# Altium PCB PCB1.PcbDoc
Units mm, origin at the board's own origin, x right, y up, seen from the top; angles counter-clockwise.
Board outline 158.53 x 100 mm, 2 copper layers (Top Layer, Bottom Layer); 23 components, 39 nets, 139 pads, 0 vias.
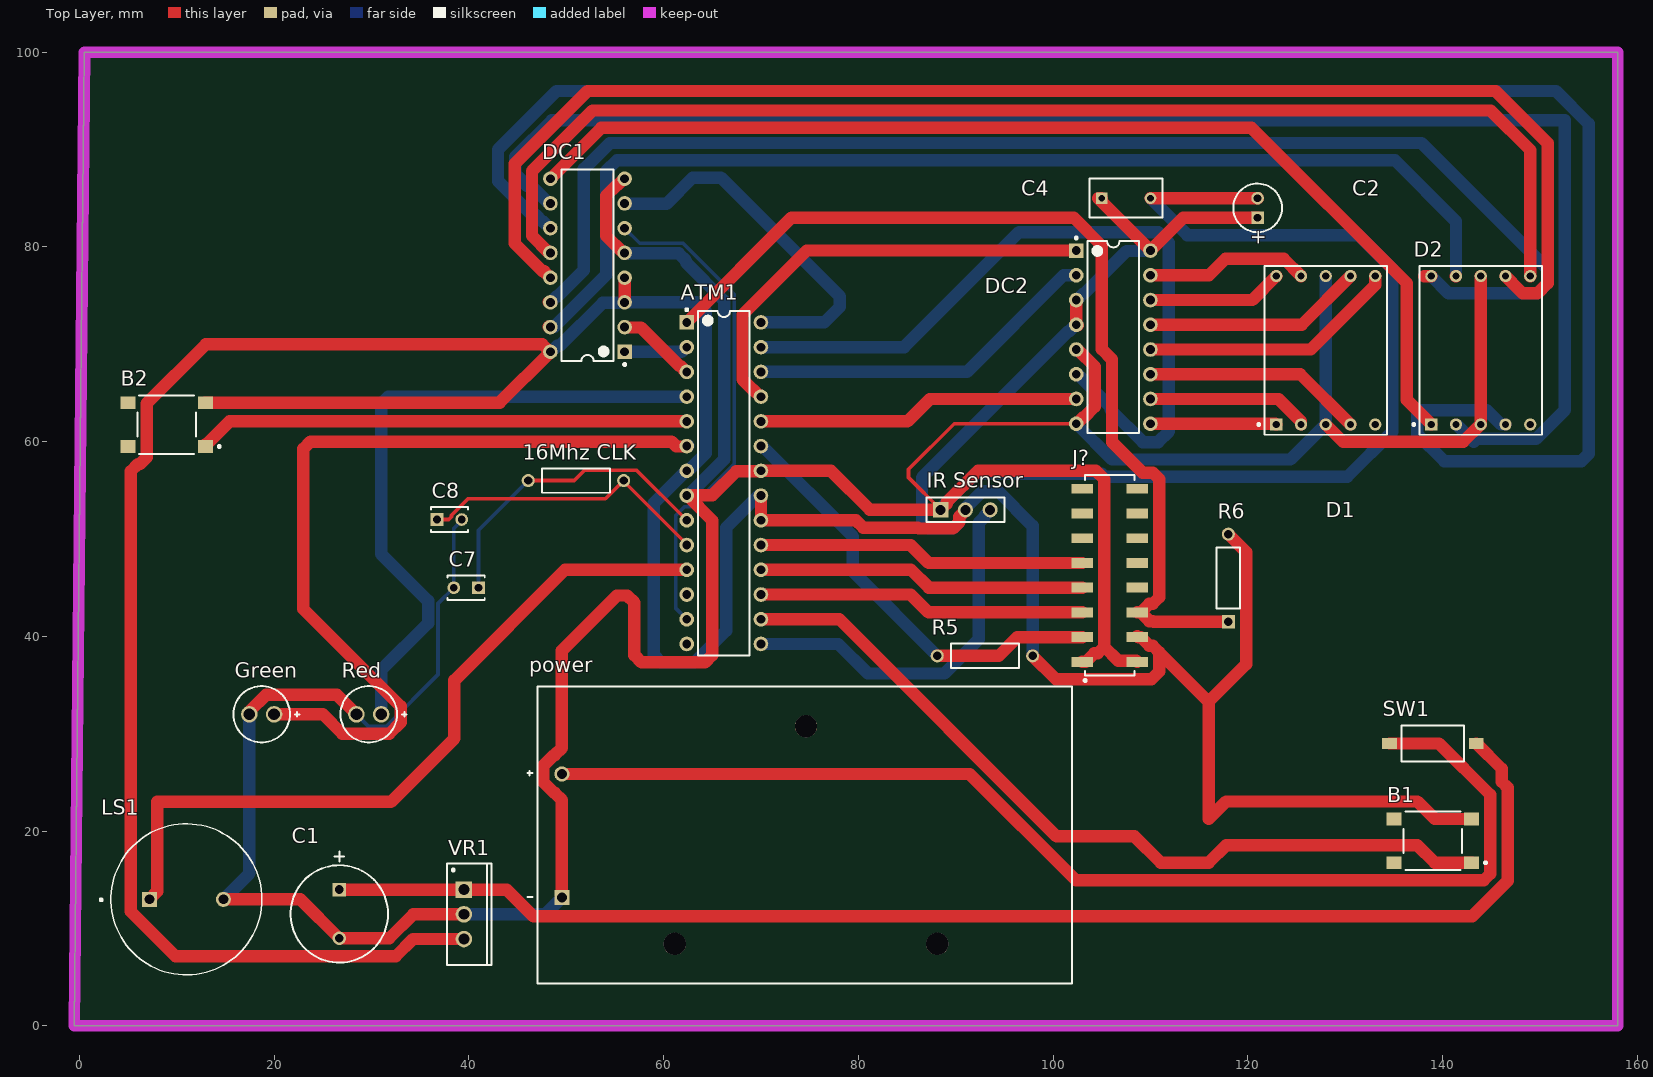
[diagram p0: Top Layer view]
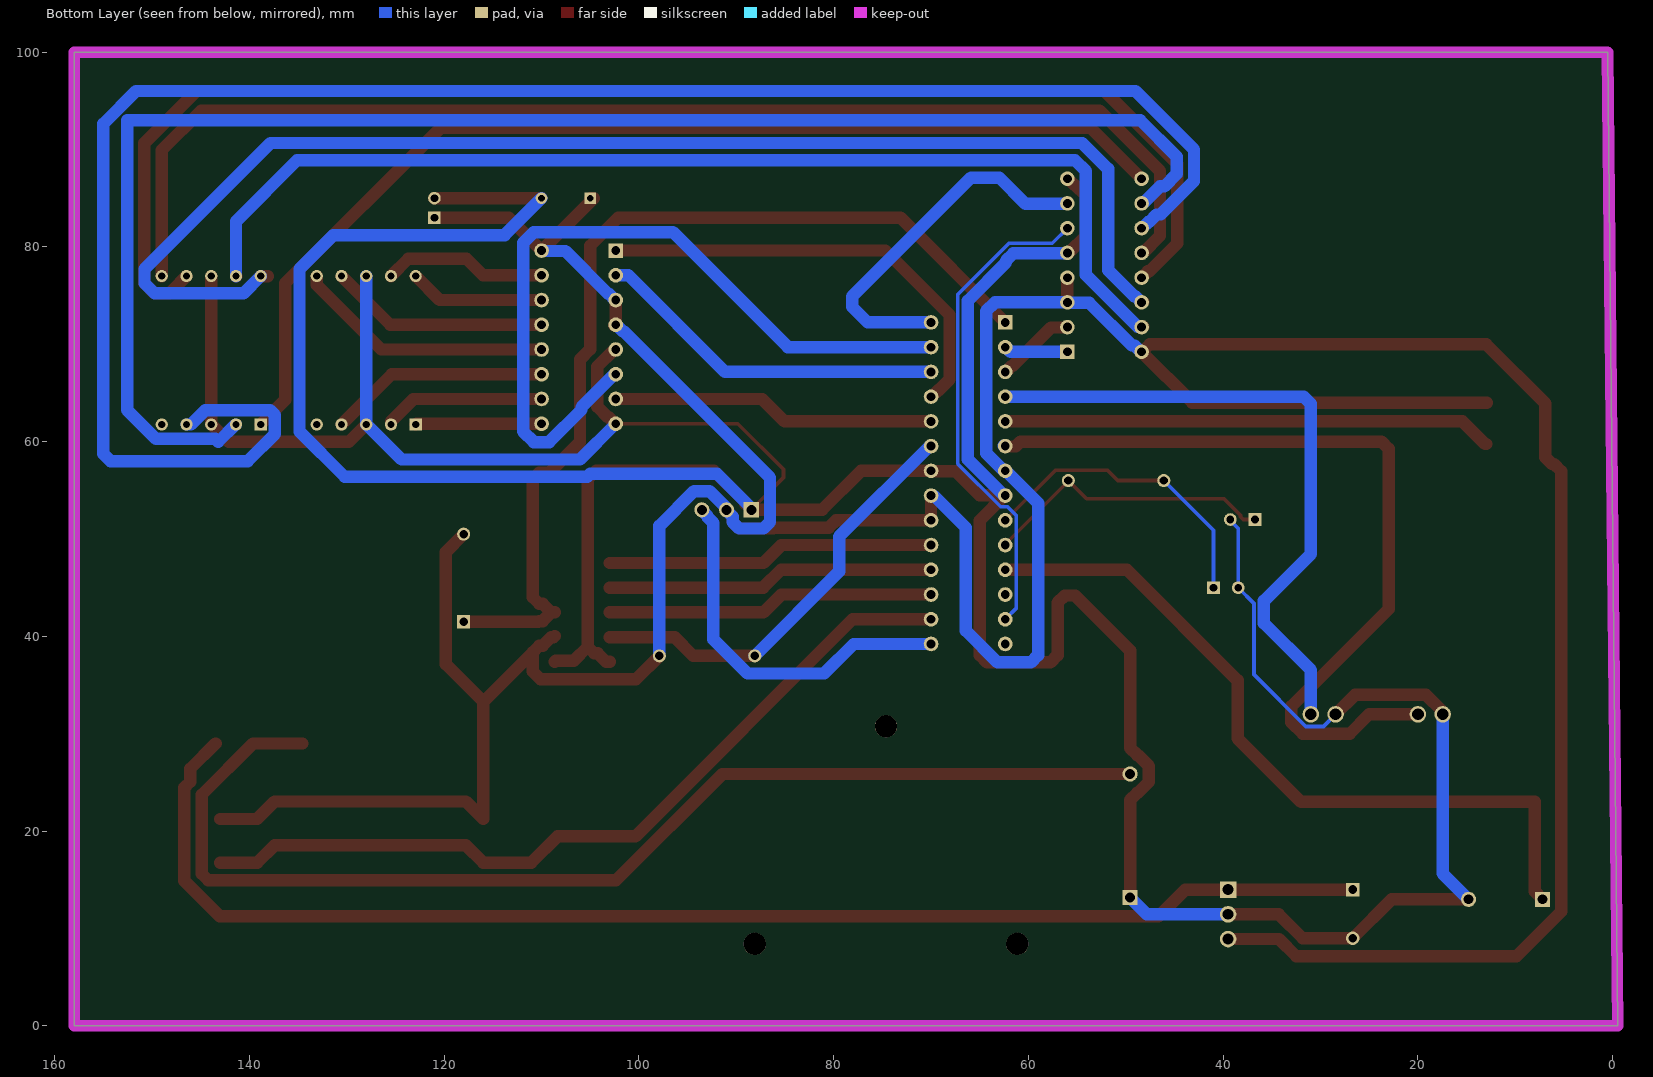
[diagram p1: Bottom Layer view, seen from below]

## Layer stack, top to bottom
Top Solder: solder mask 0.0102, Solder Resist, Dk 3.5
Top Layer: signal copper 0.0356
Dielectric 1: dielectric 0.32, FR-4, Dk 4.8
Bottom Layer: signal copper 0.0356
Bottom Solder: solder mask 0.0102, Solder Resist, Dk 3.5

## Board outline
-0.533,0 158,0 158,100 0.533,100

## Design rules (kind name [scope] priority, off if disabled: settings)
BoardOutlineClearance [All] p1: gap=0.2 ignorepadtopadclearanceinfootprint=FALSE except(0.4: Arc-SplitBarrior Arc-SplitContinuation Track-SplitBarrior Track-SplitContinuation SMDPad-SplitBarrior SMDPad-SplitContinuation THPad-SplitBarrior THPad-SplitContinuation Via-SplitBarrior Via-SplitContinuation Fill-SplitBarrior Fill-SplitContinuation Poly-SplitBarrior Poly-SplitContinuation Region-SplitBarrior Region-SplitContinuation Text-SplitBarrior Text-SplitContinuation)
Clearance "Clearance Bottom Layer" [OnLayer('Bottom Layer')] p1: gap=0.203 ignorepadtopadclearanceinfootprint=TRUE except(0.254: Arc-Text Track-Text SMDPad-Text THPad-Text Via-Text Fill-Text Poly-Text Region-Text Text-Text)
Clearance "Clearance Top Layer" [OnLayer('Top Layer')] p2: gap=0.203 ignorepadtopadclearanceinfootprint=TRUE except(0.254: Arc-Text Track-Text SMDPad-Text THPad-Text Via-Text Fill-Text Poly-Text Region-Text Text-Text)
Clearance [All] p3: gap=0.2 ignorepadtopadclearanceinfootprint=FALSE except(0.089: Arc-Arc Arc-Track Arc-SMDPad Track-Track Track-SMDPad SMDPad-SMDPad; 0.127: Arc-Via Track-Via SMDPad-Via THPad-Via Via-Via; 0.254: Arc-Text Track-Text SMDPad-Text THPad-Text Via-Text Fill-Text Poly-Text Region-Text Text-Text)
HoleSize [All] p1: absolutevalues=TRUE maxlimit=6.3 minlimit=0.2 maxpercent=80.000 minpercent=20.000
MinimumAnnularRing [All] p1: minimumring=0.076
MinimumSolderMaskSliver [All] p1: minsoldermaskwidth=0.1
PolygonConnect PolygonConnect_1 [All] p1: thpad.connectstyle=Relief thpad.reliefconductorwidth=0.508 thpad.reliefentries=4 thpad.polygonreliefangle="90 Angle" thpad.airgapwidth=0.254 smdpad.connectstyle=Relief smdpad.reliefconductorwidth=0.508 smdpad.reliefentries=4 smdpad.polygonreliefangle="90 Angle" smdpad.airgapwidth=0.254 via.connectstyle=Direct via.reliefconductorwidth=0.508 via.reliefentries=4 via.polygonreliefangle="90 Angle" via.airgapwidth=0.254
RoutingCorners [All] p1: cornerstyle=Round minsetback=2.54 maxsetback=2.54
RoutingVias [All] p1: holewidth=0.5 width=1 viastyle="Through Hole" minholewidth=0.2 minwidth=0.45 maxholewidth=1 maxwidth=2
SilkToSilkClearance [All] p1: silktosilkclearance=0.1
SilkToSolderMaskClearance [IsPad] p1: minsilkscreentomaskgap=0.1 clearancetoexposedcopper=TRUE
SolderMaskExpansion [All] p1: expansion=0.102 istentingtop=FALSE
Width [All] p1: maxlimit=2.54 minlimit=0.089 preferedwidth=0.381
25 further rules are at their usual default settings.

## Components (designator, comment, footprint, x,y, rotation, side; value= is the part's Value field where it differs from the comment)
"16Mhz CLK" "" OMTE-RES7X2.5-2 51,56 r180 top
ATM1 "ATmega328-PU" 28P3 66.19,55.73 r0 top
B1 "" FP-PTS645SM43SMTR92LFS-MFG 139,19 r180 top
B2 "" FP-PTS645SM43SMTR92LFS-MFG 8.975,61.75 r180 top
C1 "10uF" PNSC-EEU-EE2G100-2_V 26.7,11.5 r270 top
C2 "10 uF" CAPPR55-200-1100X500X1200 121,84 r90 top
C4 ".1 uF" FP-RDE5E1+0_5-4-MFG 107.5,85 r0 top
C7 "C315C220K1G5TA" KEMT-C315-THT-2 39.73,45 r180 top
C8 "C315C220K1G5TA" KEMT-C315-THT-2 38,52 r0 top
D1 "HDSP-H153" FP-HDSP-H153-MFG 128,69.38 r0 top
D2 "HDSP-H153" FP-HDSP-H153-MFG 143.92,69.38 r0 top
DC1 "" N0016A 52.19,78.11 r180 top
DC2 "" N0016A 106.19,70.73 r0 top
Green "" VISH-TSAL6200 18.73,32 r180 top
"IR Sensor" "TSW-103-07-F-S" SMTC-TSW-103-07-X-S 88.46,53 r0 top
J? "SSM-108-L-DV" SMTC-SSM-108-X-DV 105.825,46.27 r90 top
LS1 "" FP-CVS-1508-MFG 11,13 r0 top value=8Ω
power "" FP-BH9VPC-MFG 74.5,19.6 r180 top
R5 "10K" OMTE-RES7X2.5-2 93,38 r180 top
R6 "1k" RESA60-630X240 118,46 r90 top
Red "" VISH-TSAL6200 29.73,32 r180 top
SW1 "" FP-A6S-1104-H-MFG 139,29 r270 top
VR1 "" TO220 39.5,11.46 r270 top

## Footprints (in the part's own frame and the unit in brackets; to place one, negate y for a bottom-side part, rotate by r counter-clockwise, add the part's x,y. Pads: shape width x height; smd on the part's side, far side on the other; paste and mask are expansions set on the pad)
28P3 [mm] "28-Pin Plastic Dual In-Line Package (PDIP)"
  rect 1.5x1.5 hole 0.9: 1(-3.81,16.51)
  round 1.5 hole 0.9: 2(-3.81,13.97) 3(-3.81,11.43) 4(-3.81,8.89) 5(-3.81,6.35) 6(-3.81,3.81) 7(-3.81,1.27) 8(-3.81,-1.27) 9(-3.81,-3.81) 10(-3.81,-6.35) 11(-3.81,-8.89) 12(-3.81,-11.43) 13(-3.81,-13.97) 14(-3.81,-16.51) 15(3.81,-16.51) 16(3.81,-13.97) 17(3.81,-11.43) 18(3.81,-8.89) 19(3.81,-6.35) 20(3.81,-3.81) 21(3.81,-1.27) 22(3.81,1.27) 23(3.81,3.81) 24(3.81,6.35) 25(3.81,8.89) 26(3.81,11.43) 27(3.81,13.97) 28(3.81,16.51)
  silkscreen extent -3.93,-17.7 2.65,17.93, body extent -3.6,-17.65 3.6,17.65, height 4.58
CAPPR55-200-1100X500X1200 [mm] "THD, 2-Leads, Dia 5mm, Body Length 11mm"
  rect 1.3x1.3 hole 0.8: 1(-1,0)
  round 1.3 hole 0.8: 2(1,0)
  silkscreen extent -2.5,-2.5 2.5,2.5, body extent -2.5,-2.5 2.5,2.5, height 12
FP-A6S-1104-H-MFG [mm]
  rect 1.1x1.5 smd paste+0 mask+0: 1(0,-4.45) 2(0,4.45)
  silkscreen extent -1.84,-3.2 1.84,3.2, body extent -1.94,-5.3 1.94,5.3, height 0.25
FP-BH9VPC-MFG [mil]
  rect 61.65x61.65 hole 40 paste-39370.1 mask+0: 1(982,253)
  round 61.65 hole 40 paste-39370.1 mask+0: 2(982,-247)
  round 90.16 hole 90.16 unplated paste-39370.1 mask+0: ""(-536,440) ""(-5,-440) ""(526,440)
  silkscreen extent -1080,-600 1121,600, body extent -1084,-604 1084,604, height 10
FP-CVS-1508-MFG [mm]
  rect 1.55x1.55 hole 1 paste-1000 mask+0: 1(-3.8,0)
  round 1.55 hole 1 paste-1000 mask+0: 2(3.8,0)
  silkscreen extent -8.87,-7.75 7.75,7.75, body extent -7.85,-7.85 7.85,7.85, height 0.25
FP-HDSP-H153-MFG [mm]
  rect 1.25x1.25 hole 0.75 paste-1000 mask+0: 1(-5.08,-7.62)
  round 1.25 hole 0.75 paste-1000 mask+0: 2(-2.54,-7.62) 3(0,-7.62) 4(2.54,-7.62) 5(5.08,-7.62) 6(5.08,7.62) 7(2.54,7.62) 8(0,7.62) 9(-2.54,7.62) 10(-5.08,7.62)
  silkscreen extent -7.01,-8.67 6.29,8.67, body extent -6.39,-8.77 6.39,8.77, height 0.25
FP-PTS645SM43SMTR92LFS-MFG [mm]
  rect 1.55x1.3 smd paste+0 mask+0: 1(-3.975,2.25) 2(3.975,2.25) 3(-3.975,-2.25) 4(3.975,-2.25)
  silkscreen extent -5.53,-3 3,3, body extent -4.85,-3.1 4.85,3.1, height 0.25
FP-RDE5E1+0_5-4-MFG [mm]
  rect 1.2x1.2 hole 0.7 paste-1000 mask+0: 1(-2.5,0)
  round 1.2 hole 0.7 paste-1000 mask+0: 2(2.5,0)
  silkscreen extent -3.75,-2 3.75,2, body extent -3.85,-2.1 3.85,2.1, height 0.25
KEMT-C315-THT-2 [mm] "THD, 2-Leads, Body 3.81x2.54mm"
  rect 1.3x1.3 hole 0.8: 1(-1.27,0)
  round 1.3 hole 0.8: 2(1.27,0)
  silkscreen extent -1.91,-1.27 1.91,1.27, body extent -1.91,-1.27 1.91,1.27, height 4.66
N0016A [mm] "DIP, 16-Leads, Body 19.7x6.6mm, Pitch 2.54mm"
  rect 1.5x1.5 hole 0.9: 1(-3.81,8.89)
  round 1.5 hole 0.9: 2(-3.81,6.35) 3(-3.81,3.81) 4(-3.81,1.27) 5(-3.81,-1.27) 6(-3.81,-3.81) 7(-3.81,-6.35) 8(-3.81,-8.89) 9(3.81,-8.89) 10(3.81,-6.35) 11(3.81,-3.81) 12(3.81,-1.27) 13(3.81,1.27) 14(3.81,3.81) 15(3.81,6.35) 16(3.81,8.89)
  silkscreen extent -3.94,-9.85 2.65,10.31, body extent -3.95,-9.85 3.95,9.85, height 5.08
OMTE-RES7X2.5-2 [mm] "Resistor, Axial; Body 7x2.5mm, Lead Dia. 0.6mm"
  round 1.35 hole 0.85: 1(-4.9,0) 2(4.9,0)
  silkscreen extent -3.5,-1.25 3.5,1.25, body extent -3.5,-1.25 3.5,1.25, height 2.5
PNSC-EEU-EE2G100-2_V [mm] "Through-hole, 2-Leads, Base 10x10mm, Height 22mm"
  rect 1.4x1.4 hole 0.9: 1(-2.5,0)
  round 1.4 hole 0.9: 2(2.5,0)
  silkscreen extent -6.4,-5 5,5, body extent -5,-5 5,5, height 22
RESA60-630X240 [mm] "Axial Resistor, 2-Leads, Dia 2.4mm, Body Length 6.3mm"
  rect 1.35x1.35 hole 0.85: 1(-4.5,0)
  round 1.35 hole 0.85: 2(4.5,0)
  silkscreen extent -3.15,-1.2 3.15,1.2, body extent -3.15,-1.2 3.15,1.2, height 2.4
SMTC-SSM-108-X-DV [mm] "C.L. Double Vertical SMT Socket Strip, 2x8 Pins, 2.54mm Pitch, Female"
  rect 1.02x2.22 smd: 1(-8.89,2.825) 2(-8.89,-2.825) 3(-6.35,2.825) 4(-6.35,-2.825) 5(-3.81,2.825) 6(-3.81,-2.825) 7(-1.27,2.825) 8(-1.27,-2.825) 9(1.27,2.825) 10(1.27,-2.825) 11(3.81,2.825) 12(3.81,-2.825) 13(6.35,2.825) 14(6.35,-2.825) 15(8.89,2.825) 16(8.89,-2.825)
  silkscreen extent -10.92,-2.54 10.29,2.66, body extent -10.16,-3.52 10.16,3.52, height 7.49
SMTC-TSW-103-07-X-S [mm] ".025 SQ Post Terminal Strip Assembly, 1x3 Pins, Vertical, 2.54mm Pitch, Male"
  rect 1.55x1.55 hole 1.02: 1(0,0)
  round 1.55 hole 1.02: 2(2.54,0) 3(5.08,0)
  silkscreen extent -1.46,-1.27 6.54,1.27, body extent -1.27,-1.27 6.35,1.27, height 8.38
TO220 [mm] "TO, Thru-Hole, Vertical, Heatsink Mounted; 3 In-Line Leads; Pitch 2.54 mm"
  rect 1.7x1.7 hole 1.1: 1(-2.54,0)
  round 1.7 hole 1.1: 2(0,0) 3(2.54,0)
  silkscreen extent -5.2,-1.75 5.2,2.85, body extent -5.25,-1.8 5.25,2.9, height 19.7
VISH-TSAL6200 [mm] "THD, 2-Leads, Dia 5.8mm, Pitch 2.54mm"
  round 1.7 hole 1.2: 1(-1.27,0) 2(1.27,0)
  silkscreen extent -3.9,-2.9 2.9,2.9

## Part data
"16Mhz CLK" R5: library part CMP-2000-06865-1, "Little Demon(R) Carbon Composition Molded OD Series, 250 V, 10 KOhm, +/-5%, -70 to 130 degC, 2-Pin THD, RoHS, Bulk", Manufacturer=Ohmite, Operating Temperature=-, Package / Case=Axial, Package Description="2-Pin THD Resistor, Body 7 x 2.5 mm, Lead Dia. 0.6 mm", Package Reference=RES7X2.5, PartNumber=OD103JE, Power (Watts)=0.25W,1/4W, Power Rating=0.25W, Resistance (Ohms)=10k, Standard Package=100, Tolerance=±5%, Catalog Drawings=OD,OF,OASeries, Category=Resistors, Composition=CarbonComposition, Datasheet URL=http://www.ohmite.com/cat/res_od_of_oa.pdf, Datasheet Version=06/2016, EDA / CAD Models=DownloadfromAcceleratedDesigns, Family=ThroughHoleResistors, Features=PulseWithstanding, Height=-, Manufacturer URL=http://www.ohmite.com/, Mounting Technology=ThroughHole, Number of Terminations=2, Online Catalog=OD,OF,OASeries,LittleDemon®, Packaging=Bulk, RoHS Information="LittleDemon\"E\"SeriesMaterialDeclaration", Series=LittleDemon®OD, Size / Dimension="0.098\"Diax0.276\"L(2.50mmx7.00mm)", Supplier Device Package=Axial, Temperature Coefficient=-
ATM1: library part CMP-0095-00015-2, "8-bit AVR Microcontroller, 32KB Flash, 1KB EEPROM, 2KB SRAM, 28-pin PDIP, Industrial Grade (-40°C to 85°C)", ComponentLink1Description="Manufacturer URL", ComponentLink1URL=http://www.atmel.com/, ComponentLink2Description="ATmega48A/48PA/88A/88PA/168A/168PA/328/328P Datasheet", ComponentLink2URL=http://www.atmel.com/dyn/resources/prod_documents/8271.pdf, ComponentLink3Description="ATmega48A/48PA/88A/88PA/168A/168PA/328/328P Summary", ComponentLink3URL=http://www.atmel.com/dyn/resources/prod_documents/8271S.pdf, DatasheetVersion="revD, May-2011", PackageDescription="28-lead (0.300\"/7.62mm Wide) Plastic Dual Inline Package (PDIP)", PackageReference=28P3, PackageVersion="revB, Sep-2001", RevisionNote="DatasheetVersion updated. URLs added."
B1 B2: library part CMP-2000-05160-2, "SWITCH TACTILE SPST-NO 0.05A 12V", Case/Package=SMD/SMT, Color=Black, Contact Resistance=100mR, Current Rating=50mA, Max Operating Temperature=60°C, Max Voltage Rating (DC)=12V, Min Operating Temperature=-20°C, Operating Force=160gf, Package Quantity=1, Actuator Length=0.85mm, Actuator Material=Nylon, Actuator Type=Standard, Contact Material=Silver, Contact Plating=Silver, Depth=9mm, Illumination Type=Non-Illuminated, Lead Free="Lead Free", Length=6mm, Max Current Rating=50mA, Mechanical Life=100000Cycles, Mount="Surface Mount", Orientation=Straight, Packaging="Tape and Reel", REACH SVHC="No SVHC", Switch Function=Off-Mom, Termination="Gull Wing", Throw Configuration=SPST, Voltage Rating (DC)=12V
C1: library part CMP-0736-00002-1, "Aluminum Electrolytic Capacitor, 10 uF +/- 20%, 400 V, -25 to 105 degC, 2-Pin 10 x 10 x 22 mm Through-hole, RoHS, Tape and Reel", Capacitance Tolerance="+/- 20%", Manufacturer=Panasonic, PartNumber=EEU-EE2G100, Rated Voltage="400 V", Ripple Current="430 mA", Temp. Range="-25 to 105 degC", Cap.="10 uF", ComponentLink1Description="Manufacturer URL", ComponentLink1URL=http://industrial.panasonic.com/, ComponentLink2Description=Datasheet, ComponentLink2URL=http://industrial.panasonic.com/www-data/pdf/ABA0000/ABA0000CE113.pdf, ComponentLink3Description="Package Specification", ComponentLink3URL=http://industrial.panasonic.com/www-data/pdf/ABA0000/ABA0000PE245.pdf, DatasheetVersion=Nov-12, Mounting Technology="Through Hole", PackageDescription="2-Pin Through-hole, Base 10 x 10 mm, Height 22 mm", PackageReference=EEU-EE2G100-2, PackageVersion=Nov-12, Packing="Tape and Reel", RoHS=TRUE
C2: library part CMP-1665-00038-2, "Aluminum Electrolytic Capacitor, 10 uF, +/- 20%, 50 V, -40 to 85 degC, 2-Pin THD, RoHS, Bulk", Capacitance=10uF, Case/Package=Radial, Dielectric Material=Aluminium, Leakage Current=3uA, Manufacturer=Panasonic, Max Operating Temperature=85degC, Min Operating Temperature=-40degC, Package Description="2-Pin Radial Lead, Dia 5 mm, Height 12 mm", Package Quantity=200, Package Reference=CAPPR55-200-1100X500X1200, Ripple Current=65mA, Tolerance=20%, Voltage=50V, Datasheet URL=https://industrial.panasonic.com/cdbs/www-data/pdf/RDF0000/ABA0000C1218.pdf, Datasheet Version="Rev. 05, 10/2016", Diameter=5mm, Dissipation Factor=0.12%, Height=11mm, Height - Seated (Max)=0.472inch, Lead Diameter=0.5mm, Lead Free=LeadFree, Lead Pitch=2mm, Lead/Base Style=Straight, Length=11mm, Life (Hours)=2000Hour, Manufacturer URL=http://www.panasonic.com/, Mount=ThroughHole, Number of Pins=2, Packaging=Bulk, Radiation Hardening=No, REACH SVHC=NoSVHC, Ripple Current (AC)=65mA, RoHSCompliant=true, Termination=Radial, Voltage Rating=50V, Voltage Rating (DC)=50V
C4: library part CMP-06035-060479-1, "Ceramic Capacitor 100nF ±10% 1kV X7R Radial", Capacitance=100nF, Case/Package=Radial, Dielectric=X7R, Max Operating Temperature=125°C, Min Operating Temperature=-55°C, Package Quantity=1, Resistor Type=Ceramic, Tolerance=10%, Voltage Rating=1kV, Height=8mm, Height - Seated (Max)=0.315inch, Lead Diameter=0.5mm, Lead Free="Lead Free", Lead Pitch=0.197inch, Lead/Base Style=Straight, Length=0.295inch, Mount="Through Hole", Packaging="Tape and Reel", Termination=Radial, Voltage Rating (DC)=1kV, Width=0.157inch
C7 C8: library part CMP-1664-00008-1, "Capacitor, Ceramic, 22 pF, +/-10 %, 100 V, -55 to 125 degC, 2-Pin THD, RoHS, Bulk", Case\Package=TO-220, Max Input Voltage="40 V", Max Operating Temperature="125 degC", Max Ouput Current="1.5 A", Min Input Voltage="4.2 V", Min Operating Temperature="0 degC", Output Voltage="1.2 V", Package Quantity=50, ComponentLink1Description="Manufacturer URL", ComponentLink1URL=http://www.kemet.com/, ComponentLink2Description=Datasheet, ComponentLink2URL=http://capacitoredge.kemet.com/capedge2/DataSheet/Datasheet-C315C220K1G5TA.pdf?pn=C315C220K1G5TA{BULK}, DatasheetVersion=Aug-16, Height="9.28 mm", Length="10.28 mm", Mount="Through Hole", Output Current="1.5 A", Outputs=1, PackageDescription="2-Pin Through Hole Device, Body 3.81 x 2.54 mm", PackageReference=C315-THT-2, Packaging=Rail/Tube, Pins=3, Radiation Hardening=No, REACH SVHC="No SVHC", RoHSCompliant=true, Weight="0.08113 oz", Width="4.82 mm"
D1 D2: library part CMP-18395-000002-1, "LED 7-SEG 14.2MM CC RED RHD RHD", Forward Current=100mA, Forward Voltage=2V, Manufacturer=Broadcom, Power Dissipation=96mW, Reverse Voltage=15V, Temperature="-20°C to +100°C", Temperature Range High=+100°C, Temperature Range Low=-20°C, Automotive=No, Category=Disp, ComponentLink2Description=Datasheet, ComponentLink2URL=https://docs.broadcom.com/docs/AV02-1107EN, Device Class L1=Optoelectronics, Device Class L2=Displays, Device Class L3="LED Displays", Digikey Description="LED 7-SEG 14.2MM CC RED RHD RHD", Display Type=LED, Element Config="Common Cathode", Height=8mm, Lead Free=Yes, Luminous Intensity=16mcd, Manufacturer Part Number=HDSP-H153, Octopart=https://octopart.com/hdsp-h153-broadcom-71129578, Package=HDSP-H153, RoHS=TRUE, Standoff Height=1.14mm, Test Current=100mA, Viewing Angle=100°, Wavelength=637nm
DC1 DC2: library part CMP-0388-00316-2, "CMOS BCD-to-7-Segment LED Latch / Decoder / Driver, 3 to 18 V, -55 to 125 degC, 16-pin DIP (N16), Pb-Free (RoHS)", Manufacturer="Texas Instruments", PartNumber=CD4511BE, Rating=Military, Code_JEDEC=MS-001, ComponentLink1Description="Manufacturer URL", ComponentLink1URL=http://www.ti.com/, ComponentLink2Description=Datasheet, ComponentLink2URL=http://www.ti.com/general/docs/lit/getliterature.tsp?genericPartNumber=CD4511B&fileType=pdf, ComponentLink3Description="Package Specification", ComponentLink3URL=http://www.ti.com/litv/pdf/mpdi002c, DatasheetVersion=SCHS072B, Eco-Plan="Pb-Free (RoHS)", Mounting Technology="Through Hole", PackageDescription="16-Pin Plastic In-Line, Body 19.305 x 6.35 mm, Pitch 2.54 mm", PackageReference=N0016A, PackageVersion=4040049/E, SubFamily="Discrete Segment LED Driver", Vin(Max)(V)=18, Vin(Min)(V)=3
Green Red: library part CMP-2000-07327-1, "High Power Infrared Emitting Diode, GaAlAs, MQW, 1.35 V, 100 mA, -40 to 85 degC, 2-Pin THD, RoHS, Bulk", Forward Current=100mA, Forward Voltage=3V, Manufacturer=Vishay, Operating Temp Range=-40Cto85C, Operating Temperature Classification=Industrial, Package Description="2-Pin Through Hole Device, Dia 5.8 mm, Pitch 2.54 mm", Package Reference=TSAL6200, Package Type=T-13/4, Power Dissipation=160W, Reverse Voltage=5V, Chip Material=GaAlAs, Datasheet URL=http://www.vishay.com/docs/81010/tsal6200.pdf, Datasheet Version="Rev. 2.4, 03/2014", DELETED=Compliant, High Brightness=Yes, Lens Dimensions=5x5x7.7mm, Lens Type=Colored, Lum Intensity=500mW/srmcd, Luminous Intensity=500mW/sr, Main Category=IrLED, Manufacturer URL=http://www.vishay.com/, Mounting=ThroughHole, Mounting Technology=ThroughHole, Number of  Elements=1, Packaging=Bulk, Peak Wavelength=950nm, Pin Count=2, Product Depth (mm)=5.8mm, Product Height (mm)=8.7mm, Product Length (mm)=5.8mm, Rad Hardened=No, Shape Type=Circular, Test Current (It)=100mA, Type=IrLED, Viewing Angle=34deg
"IR Sensor": library part CMP-1024-00331-1, "0.025\" SQ Post Header, Through-hole, Vertical, -55 to 125 degC, 2.54 mm Pitch, 3-Pin, Male, RoHS", Manufacturer=Samtec, Temperature Range="-55 to 125 degC", ComponentLink1Description="Manufacturer URL", ComponentLink1URL=http://www.samtec.com, ComponentLink2Description=Datasheet, ComponentLink2URL=http://www.samtec.com/documents/webfiles/pdf/TSW_TH.PDF, ComponentLink3Description="Package Specification", ComponentLink3URL=http://www.samtec.com/documents/webfiles/cpdf/TSW-XXX-XX-XXX-X-XX-XXX-MKT.pdf, DatasheetVersion=F-214, Mounting Technology=Through-hole, Orientation=Vertical, PackageDescription=".025[0.64] SQ. Post Terminal Strip Assembly", PackageReference=TSW-103-07-X-S, PackageVersion="DM, 8/1988", PartNumber=TSW-103-07-F-S, Pitch="2.54 mm", RoHS=True
J?: library part CMP-1023-00226-1, "Tiger Claw(TM) Surface Mount Socket, Vertical, -55 to 125 degC, 2.54 mm Pitch, 16-Pin, Female, RoHS", Manufacturer=Samtec, Temperature Range="-55 to 125 degC", ComponentLink1Description="Manufacturer URL", ComponentLink1URL=http://www.samtec.com, ComponentLink2Description=Datasheet, ComponentLink2URL=http://www.samtec.com/documents/webfiles/pdf/SSM_SM.PDF, ComponentLink3Description="Package Specification", ComponentLink3URL=http://www.samtec.com/documents/webfiles/cpdf/SSM-1XX-XXX-DV-XX-XX-X-XX-MKT.pdf, DatasheetVersion=F-214, Mounting Technology="Surface Mount", Orientation=Vertical, PackageDescription=".100 C.L. Double Vertical SMT Socket Strip", PackageReference=SSM-108-X-DV, PackageVersion="AK, 3/2000", PartNumber=SSM-108-L-DV, Pitch="2.54 mm", RoHS=True
LS1: library part CMP-14846-000001-1, "SPEAKER 8OHM 300MW TOP PORT 87DB", Frequency=1700Hz, Manufacturer="CUI Inc", Manufacturer Part Number=CVS-1508, Resistance=8Ω, Temperature="-20°C to +55°C", Temperature Range High=+55°C, Temperature Range Low=-20°C, Automotive=No, Category=Speak, ComponentLink2Description=Datasheet, ComponentLink2URL=https://www.cui.com/product/resource/cvs-1508.pdf, Device Class L1=Electromechanical, Device Class L2="Audio Products", Device Class L3=Speakers, Digikey Description="SPEAKER 8OHM 300MW TOP PORT 87DB", Height=8mm, Lead Free=Yes, Mouser Description="Speakers & Transducers Speakers", Octopart=https://octopart.com/cvs-1508-cui-21325683, Package=CVS-1508, RoHS=TRUE
power: library part CMP-136216-000001-1, "BATTERY HOLDER 9V PC PIN", Manufacturer="Memory Protection Devices", Manufacturer Part Number=BH9VPC, Package=0, Voltage Rating=9V, Automotive=No, Category=Batt, ComponentLink2Description=Datasheet, ComponentLink2URL=http://www.memoryprotectiondevices.com/datasheets/BH9VPC-datasheet.pdf, Conn Orientation=Vertical, Contact Material=Nickel, Device Class L1=Connectors, Device Class L2=unset, Device Class L3=unset, Digikey Description="BATTERY HOLDER 9V PC PIN", Height=21.12mm, Is Female=yes, Lead Free=Yes, Number Of Contacts=2, Octopart=https://octopart.com/bh9vpc-memory+protection+devices-22788154, RoHS=TRUE
R6: library part CMP-1659-00075-1, "Axial Resistor, 1 KOhm, +/- 1%, 250 mW, -55 to 155 degC, 2-Pin THD, RoHS, Bulk", Case\Package=Axial, Max Operating Temperature="155 degC", Min Operating Temperature="-55 degC", Package Quantity=200, Power Rating="250 mW", Resistance="10 kohm", Tolerance=1%, Voltage Rating="250 V", ComponentLink1Description="Manufacturer URL", ComponentLink1URL=http://www.yageo.com/, ComponentLink2Description=Datasheet, ComponentLink2URL=http://www.yageo.com/documents/recent/Yageo%20LR_MFR_2013.pdf, DatasheetVersion=Apr-13, Length="0.248 inch", PackageDescription="2-Pin Axial Lead, Dia 2.4 mm, Body Length 6.3 mm", PackageReference=MFR-25, Packaging=Bulk, RoHSCompliant=true
SW1: library part CMP-08827-000005-1, "SWITCH SLIDE DIP SPST 25MA 24V", Ambient Temperature Range High=+70°C, Ambient Temperature Range Low=-20°C, Contact Current Rating=25mA, Contact Resistance=200mΩ, Manufacturer="Omron Electronics Inc-EMC Div", Manufacturer Part Number=A6S-1104-H, Package=0, Temperature="-20°C to +70°C", Voltage Rating Dc=24V, Automotive=No, Category=Switch, ComponentLink2Description=Datasheet, ComponentLink2URL=https://omronfs.omron.com/en_US/ecb/products/pdf/en-a6s.pdf, Device Class L1=Electromechanical, Device Class L2=Switches, Device Class L3="DIP Switches", Digikey Description="SWITCH SLIDE DIP SPST 25MA 24V", Electromechanical Life=1000Cycles, Height=3.95mm, Lead Free=Yes, Mount="Surface Mount", Mouser Description="DIP Switches / SIP Switches Dip Switch", Number Of Circuits=1, Octopart=https://octopart.com/a6s-1104-h-omron-55410938, RoHS=TRUE, Standoff Height=0mm, Temperature Range High=+70°C, Temperature Range Low=-20°C, Throw Configuration=SPST-NO
VR1: library part CMP-0244-00483-1, "Positive Voltage Regulator, 5V, 3-Pin TO-220", ComponentLink1Description="Manufacturer URL", ComponentLink1URL=http://www.st.com, ComponentLink2Description=Datasheet, ComponentLink2URL=http://www.st.com/internet/com/TECHNICAL_RESOURCES/TECHNICAL_LITERATURE/DATASHEET/CD00000444.pdf, ComponentLink3Description="Package Specification", ComponentLink3URL=http://www.st.com/internet/com/TECHNICAL_RESOURCES/TECHNICAL_LITERATURE/PACKAGE_INFORMATION/CD00004649.pdf, DatasheetVersion=16/11/2011, PackageDescription="TO, Thru-Hole, Vertical, Heatsink Mounted; 3 In-Line Leads; Pitch 2.54 mm", PackageReference=TO220, PackageVersion=ver3.0

## Nets (pads, with @x,y where several pads share a name; then routed paths per layer and width w, separated by ;. In a path a pad name is that pad's centre, name@x,y a point inside that pad or via, vN(x,y) a via of type N, cw(c..) or ccw(c..) an arc to the next point about the centre after c; other vN are vias at no path point)
"Net16Mhz CLK_1": "16Mhz CLK.1" ATM1.10 C8.1 | length 30.2
  Top Layer w0.381: C8.1 37.952,52 38.226,52.275 38.226,52.432 39.917,54.123 54.023,54.123 55.9,56 55.9,55.93 62.38,49.45 ATM1.10
"Net16Mhz CLK_2": "16Mhz CLK.2" ATM1.9 C7.1 | length 32
  Top Layer w0.381: 46.1,56 50.818,56 51.887,57.069 57.231,57.069 ATM1.9
  Bottom Layer w0.381: C7.1 41,50.9 46.1,56
NetATM1_1: ATM1.1 J?.6 R6.1 | length 99.7
  Top Layer w1.27: ATM1.1 73.14,83 102.116,83 105,80.116 105,69.492 106.051,68.441 106.051,59.949 109.187,56.813 110.233,56.813 110.903,56.143 110.903,44.017 110.233,43.347 109.887,43.347 J?.6@109,42.46 ; J?.6 J?.6@109,42.46 ; R6.1 110.306,41.5 110.233,41.573 109.887,41.573 J?.6@109,42.46
NetATM1_2: ATM1.2 DC1.1 | length 6.6
  Top Layer w1.27: ATM1.2 ATM1.2@62.424,69.744
  Bottom Layer w1.27: DC1.1 61.838,69.22 62.318,69.7 ATM1.2
NetATM1_3: ATM1.3 DC1.2 | length 8.3
  Top Layer w1.27: DC1.2 56.044,71.716 57.687,71.716 61.596,67.807 61.671,67.807 62.318,67.16 ATM1.3
  Bottom Layer w1.27: ATM1.3 ATM1.3@62.442,67.16
NetATM1_4: ATM1.4 Red.1 | length 67.6
  Bottom Layer w1.27: Red.1 31,36.534 35.818,41.352 35.818,43.648 31,48.466 31,63.876 31.744,64.62 ATM1.4
NetATM1_5: ATM1.5 B2.1 | length 50.4
  Top Layer w1.27: B2.1@12.975,59.75 13.1,59.75 15.43,62.08 ATM1.5
NetATM1_6: ATM1.6 Green.1 | length 86.6
  Top Layer w1.27: Green.1 25.016,32 27.009,30.007 31.826,30.007 32.993,31.174 32.993,32.826 23,42.819 23,59.256 23.744,60 60.811,60 61.315,59.496 62.336,59.496 ATM1.6
  Bottom Layer w1.27: ATM1.6 62.424,59.584 ATM1.6@62.561,59.584
NetATM1_7: "IR Sensor.2" ATM1.7 ATM1.20 ATM1.21 B1.3 B2.3 C2.1 C4.1 DC1.3 DC1.4 DC1.16 DC2.3 DC2.4 DC2.16 J?.4 R5.1 R6.2 VR1.3 | length 455
  Top Layer w1.27: B2.3 43.16,64 DC1.16 48.318,69.22 47.538,70 13,70 6.918,63.918 6.918,58.377 6.248,57.707 6.026,57.707 5.282,56.963 5.282,11.752 9.877,7.157 32.501,7.157 34.264,8.92 VR1.3 ; DC1.4@55.938,76.84 DC1.4 DC1.3 ; ATM1.21 ATM1.20 79.757,51.92 80.519,51.158 86.11,51.158 86.186,51.082 89.708,51.082 90.378,51.752 90.378,52.302 91,52.924 91,53 ; R5.1 100.298,35.602 110.108,35.602 110.903,36.397 110.903,38.363 ; DC2.3 DC2.4 102.424,71.956 DC2.4@102.561,71.956 ; C4.1 104.62,85 DC2.16 113.38,83 C2.1 ; J?.4@108.65,40.045 108.775,39.92 109,39.92 109.887,39.033 110.233,39.033 110.903,38.363 ; R6.2 118,50.487 119.818,48.669 119.818,37.134 115.975,33.291 ; B1.3 139.202,21.25 137.409,23.043 117.768,23.043 115.975,21.25 115.975,33.291 ; 110.903,38.363 115.975,33.291
  Bottom Layer w1.27: VR1.3@39.384,8.92 VR1.3 ; DC1.16 48.442,69.22 49.089,69.867 49.381,69.867 53.77,74.256 55.956,74.256 DC1.3 63.436,74.3 64.339,73.397 64.339,58.822 62.561,57.044 62.424,57.044 ATM1.7 62.318,57 59,53.682 59,38.071 59.744,37.327 63.164,37.327 66.42,40.583 66.42,51.16 69.675,54.416 69.956,54.416 ATM1.21 ; ATM1.20 ATM1.20@70.062,51.92 ; R5.1 97.9,51.352 94.334,54.918 92.746,54.918 91.054,53.226 91.054,53.054 91,53 91,52.924 90.378,52.302 90.378,51.752 89.708,51.082 87.212,51.082 86.542,51.752 86.542,56.299 101.596,71.353 101.671,71.353 102.318,72 DC2.4 ; DC2.3 102.442,74.54 103.089,75.187 103.164,75.187 107.553,79.576 109.956,79.576 DC2.16
NetATM1_8: "IR Sensor.1" ATM1.8 ATM1.22 C1.2 C2.2 C4.2 C7.2 C8.2 D1.3 D1.8 D2.3 D2.8 DC1.5 DC1.8 DC2.5 DC2.8 Green.2 J?.1 J?.2 LS1.2 power.1 Red.2 VR1.2 | length 499.2
  Top Layer w0.381: 88.46,53 85.158,56.302 85.158,57.158 89.84,61.84 DC2.8
  Top Layer w1.27: LS1.2 22.7,13 C1.2 31.829,9 34.289,11.46 VR1.2 ; Green.2 17.542,32.082 17.542,32.361 19.174,33.993 26.467,33.993 Red.2 ; power.1 49.557,23.204 48.813,23.948 48.759,23.948 47.631,25.076 47.631,26.672 48.759,27.8 48.813,27.8 49.557,28.544 49.557,38.557 55.204,44.204 56.256,44.204 57,43.46 57,38.071 57.744,37.327 64.256,37.327 65,38.071 65,51.902 62.442,54.46 ATM1.8 62.424,54.504 65.026,54.504 67.478,56.956 69.956,56.956 ATM1.22 77.191,57 81.191,53 88.46,53 89.082,53.622 89.082,53.794 92.288,57 104.396,57 105.253,56.143 105.253,38.937 ; DC1.5 55.956,79.424 55.819,79.424 54.107,81.136 54.107,85.244 55.216,86.353 55.291,86.353 55.938,87 DC1.8 ; DC2.8 102.442,61.84 103.089,62.487 103.164,62.487 104.273,63.596 104.273,67.704 102.561,69.416 102.424,69.416 DC2.5 DC2.5@102.442,69.46 ; J?.1 103.35,37.38 104.237,38.267 104.583,38.267 105.253,38.937 ; J?.2 108.525,37.505 106.685,37.505 105.253,38.937 ; C4.2 C2.2 ; D1.3 129.778,59.982 142.102,59.982 143.88,61.76 D2.3 D2.8
  Bottom Layer w0.381: Red.2 29.704,30.756 31.515,30.756 36.847,36.088 36.847,43.387 C7.2 38.46,51.083 39.27,51.893 C8.2
  Bottom Layer w1.27: LS1.2 17.46,15.66 Green.2 ; VR1.2 47.843,11.46 power.1 ; DC1.5 56.044,79.336 61.56,79.336 62.304,78.592 62.304,78.389 66.222,74.471 66.222,58.165 62.561,54.504 62.424,54.504 ATM1.8 ; 88.46,53 88.6,53.14 88.6,53.312 91.984,56.696 105.01,56.696 105.315,56.391 130.211,56.391 134.848,61.028 134.848,77.732 131.373,81.207 113.793,81.207 C4.2 ; DC2.8 106.051,58.169 124.369,58.169 127.96,61.76 D1.3 D1.8
NetATM1_11: ATM1.11 LS1.1 | length 78.1
  Top Layer w1.27: LS1.1 8,13.8 8,23 32,23 38.522,29.522 38.522,35.488 49.874,46.84 ATM1.11
NetATM1_13: ATM1.13 DC1.6 | length 50.8
  Bottom Layer w0.381: DC1.6 57.555,80.365 61.986,80.365 67.251,75.1 67.251,57.713 62.854,53.316 62.159,53.316 61.236,52.394 61.236,42.904 ATM1.13
NetATM1_15: "IR Sensor.3" ATM1.15 | length 38.9
  Bottom Layer w1.27: ATM1.15 77.939,39.22 80.977,36.182 88.853,36.182 92.356,39.685 92.356,51.644 92.918,52.206 92.918,52.302 93.54,52.924 93.54,53
NetATM1_16: ATM1.16 B1.1 | length 84.8
  Top Layer w1.27: ATM1.16 78.059,41.76 100.362,19.457 108.359,19.457 111.066,16.75 115.975,16.75 117.768,18.543 137.409,18.543 139.202,16.75 B1.1
NetATM1_17: ATM1.17 J?.5 | length 33.8
  Top Layer w1.27: ATM1.17 85.374,44.3 87.214,42.46 J?.5
NetATM1_18: ATM1.18 J?.7 | length 33.8
  Top Layer w1.27: ATM1.18 85.399,46.84 87.239,45 J?.7
NetATM1_19: ATM1.19 J?.9 | length 33.8
  Top Layer w1.27: ATM1.19 85.374,49.38 87.214,47.54 J?.9
NetATM1_23: ATM1.23 J?.3 R5.2 | length 44.8
  Top Layer w1.27: R5.2 94.414,38 96.334,39.92 J?.3
  Bottom Layer w1.27: ATM1.23 70.044,59.496 70.181,59.496 79.434,50.243 79.434,46.666 R5.2
NetATM1_24: ATM1.24 DC2.7 | length 33.3
  Top Layer w1.27: ATM1.24 85.04,62.08 87.34,64.38 DC2.7
NetATM1_25: ATM1.25 DC2.1 | length 46.3
  Top Layer w1.27: ATM1.25 69.938,64.62 69.291,65.267 69.216,65.267 68.107,66.376 68.107,73.024 74.703,79.62 DC2.1
NetATM1_26: ATM1.26 DC2.2 | length 36.5
  Bottom Layer w1.27: ATM1.26 91.16,67.16 101.08,77.08 DC2.2
NetATM1_27: ATM1.27 DC2.6 | length 79.6
  Bottom Layer w1.27: ATM1.27 84.7,69.7 96.513,81.513 110.784,81.513 111.893,80.404 111.893,61.056 110.784,59.947 109.216,59.947 105.889,63.274 105.889,63.549 102.561,66.876 102.424,66.876 DC2.6
NetATM1_28: ATM1.28 DC1.7 | length 38.2
  Top Layer w1.27: ATM1.28 ATM1.28@70.062,72.24
  Bottom Layer w1.27: DC1.7 56.044,84.416 60.301,84.416 63,87.115 65.885,87.115 78.102,74.898 78.102,73.846 76.496,72.24 ATM1.28
NetC1_1: C1.1 SW1.2 VR1.1 | length 138.4
  Top Layer w0.254: C1.1 C1.1@26.9,13.8
  Top Layer w1.27: C1.1 VR1.1 43.888,14 46.64,11.248 143.029,11.248 146.671,14.89 146.671,24.477 146.074,25.074 146.074,26.406 143.48,29 SW1.2
NetD1_1: D1.1 DC2.9 | length 13
  Top Layer w1.27: DC2.9 122.84,61.84 D1.1
NetD1_2: D1.2 DC2.10 | length 16.7
  Top Layer w1.27: DC2.10 123.166,64.38 125.46,62.086 D1.2
NetD1_4: D1.4 DC2.11 | length 22.7
  Top Layer w1.27: DC2.11 125.38,66.92 D1.4
NetD1_6: D1.6 DC2.12 | length 26.7
  Top Layer w1.27: DC2.12 126.46,69.46 133.08,76.08 D1.6
NetD1_7: D1.7 DC2.13 | length 22.6
  Top Layer w1.27: DC2.13 125.54,72 D1.7
NetD1_9: D1.9 DC2.15 | length 16.9
  Top Layer w1.27: DC2.15 116.01,77.08 117.708,78.778 123.682,78.778 D1.9
NetD1_10: D1.10 DC2.14 | length 13.9
  Top Layer w1.27: DC2.14 120.46,74.54 D1.10
NetD2_1: D2.1 DC1.9 | length 112.3
  Top Layer w1.27: DC1.9 53.602,92.222 120.372,92.222 136.328,76.266 136.328,64.272 D2.1
NetD2_2: D2.2 DC1.10 | length 159
  Bottom Layer w1.27: DC1.10 48.336,84.504 48.199,84.504 46.487,86.216 46.043,86.216 44.778,87.48 44.778,89.264 48.514,93 152.561,93 152.561,63.252 149.596,60.287 143.502,60.287 143.198,59.982 141.42,61.76 D2.2
NetD2_4: D2.4 DC1.11 | length 191.3
  Bottom Layer w1.27: DC1.11 48.318,81.92 47.671,82.567 47.596,82.567 46.844,83.319 46.425,83.319 43,86.744 43,90 49,96 151.644,96 155,92.644 155,58.744 154.256,58 140.165,58 137.377,60.788 137.377,62.732 137.878,63.233 144.516,63.233 145.989,61.76 D2.4
NetD2_6: D2.6 DC1.12 | length 129
  Top Layer w1.27: DC1.12 48.336,79.424 48.199,79.424 46.487,81.136 46.487,87.784 52.703,94 144.927,94 149,89.927 D2.6
NetD2_7: D2.7 DC1.13 | length 144.6
  Top Layer w1.27: DC1.13 47.733,77.487 47.596,77.487 44.709,80.374 44.709,88.521 52.188,96 145.442,96 150.778,90.664 150.778,76.264 149.736,75.222 148.224,75.222 147.182,76.264 147.182,76.278 D2.7
NetD2_9: D2.9 DC1.15 | length 114.8
  Top Layer w1.27: DC1.15@48.199,71.804 48.336,71.804 DC1.15 ; D2.9@141.354,77 D2.9
  Bottom Layer w1.27: DC1.15 48.424,71.804 48.804,71.804 54.107,77.107 54.107,87.784 55.216,88.893 135.107,88.893 141.38,82.62 D2.9
NetD2_10: D2.10 DC1.14 | length 136.1
  Top Layer w1.27: DC1.14@48.199,74.344 48.336,74.344 DC1.14 ; 138.109,77 D2.10
  Bottom Layer w1.27: DC1.14 49.027,74.947 49.164,74.947 51.822,77.605 51.822,88.013 54.479,90.671 137.829,90.671 150.768,77.732 150.768,76.268 149.722,75.222 140.604,75.222 138.84,76.986 D2.10
Netpower_2: power.2 SW1.1 | length 120.8
  Top Layer w1.27: power.2 91.431,25.874 102.348,14.957 144.223,14.957 144.893,15.627 144.893,23.741 139.634,29 SW1.1
pads on no net: ATM1.12 ATM1.14 B1.2 B1.4 B2.2 B2.4 D1.5 D2.5 J?.8 J?.10 J?.11 J?.12 J?.13 J?.14 J?.15 J?.16 power.

## Keep-outs
Keep-Out Layer:
  the board outline again, w1.2

## Text inside footprints (layer, text, board x,y; h text height)
C2: Top Overlay "+" at 121.737,80.092 h1.5 r90